# Altium PCB Main.PcbDoc
Units mm, origin at the board's own origin, x right, y up, seen from the top; angles counter-clockwise.
Board outline 15.1 x 29.72 mm, 2 copper layers (Top Layer, Bottom Layer); 24 components, 16 nets, 68 pads, 17 vias.
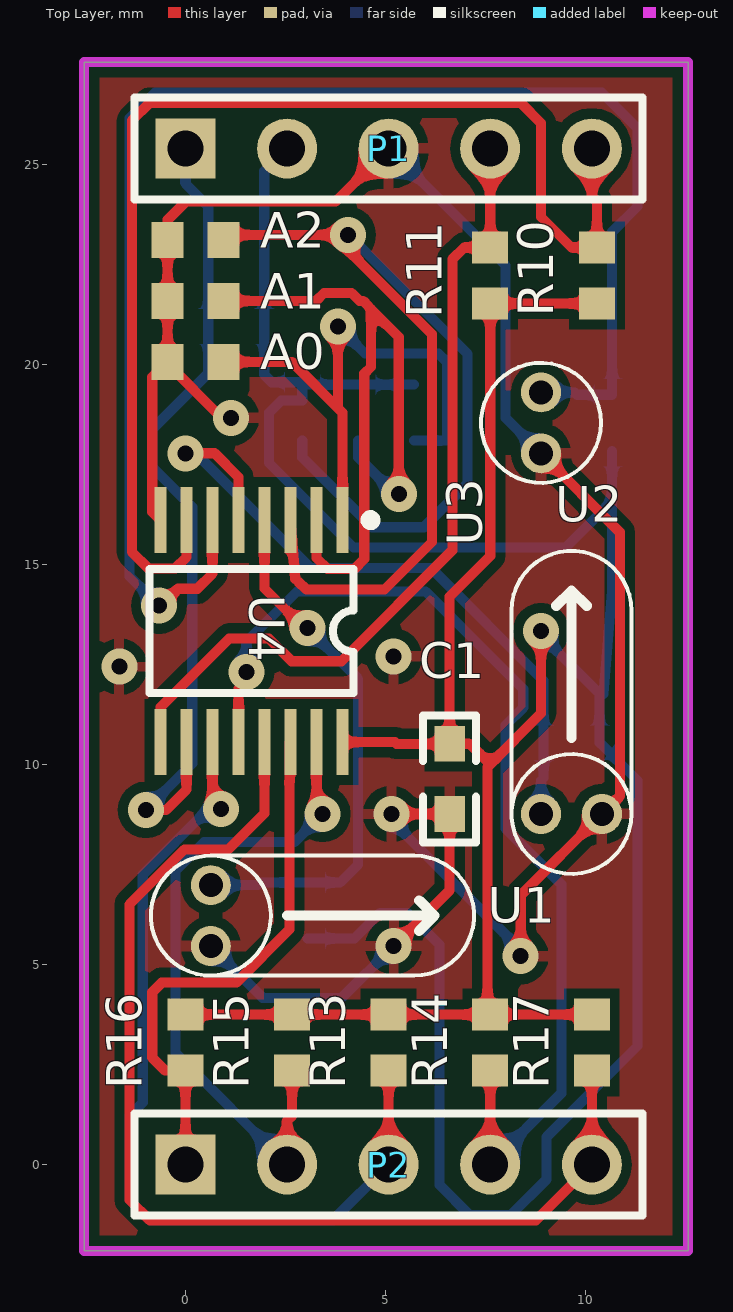
[diagram p0: Top Layer view]
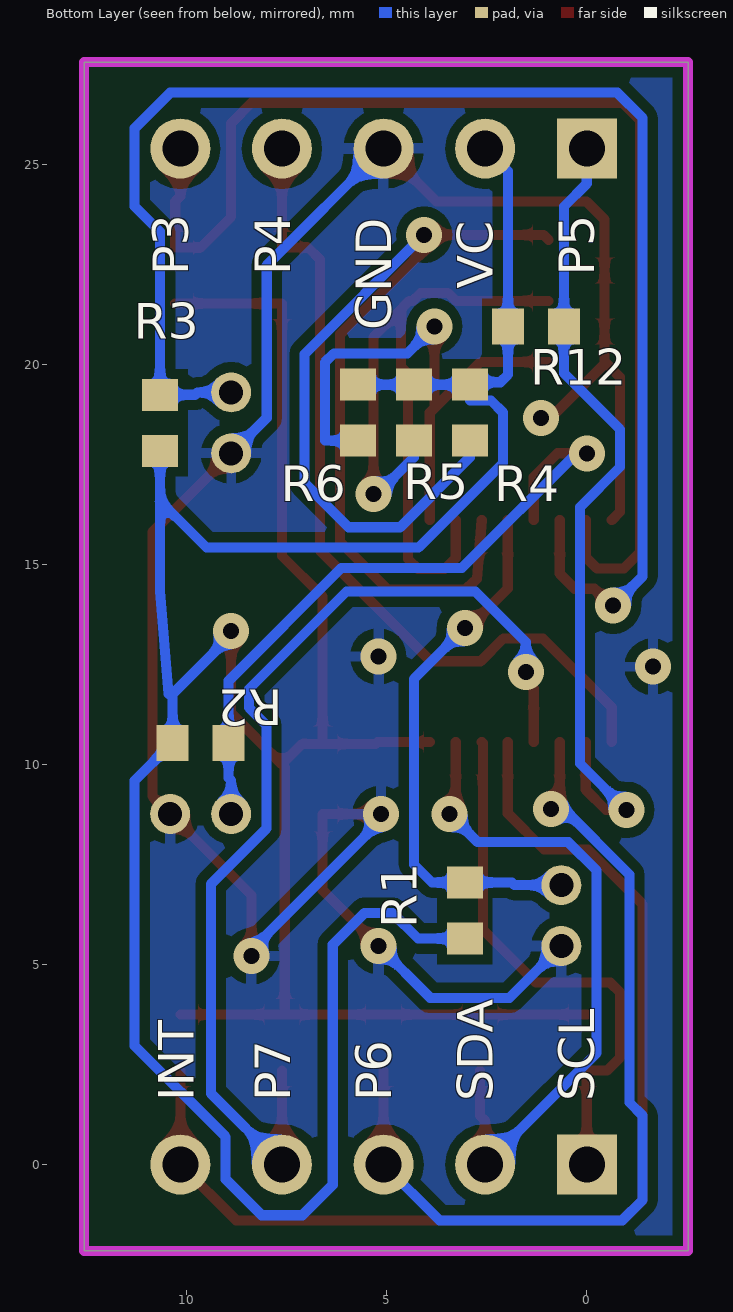
[diagram p1: Bottom Layer view, seen from below]

## Layer stack, top to bottom
Top Solder: solder mask 0.0102, Solder Resist, Dk 3.5
Top Layer: signal copper 0.0356
Dielectric 1: dielectric 0.32, FR-4, Dk 4.8
Bottom Layer: signal copper 0.0356
Bottom Solder: solder mask 0.0102, Solder Resist, Dk 3.5

## Board outline
-2.532,-2.159 -2.532,27.559 12.565,27.559 12.565,-2.159

## Design rules (kind name [scope] priority, off if disabled: settings)
Clearance [All] p1: gap=0.254 ignorepadtopadclearanceinfootprint=FALSE except(0: Arc-Hole Track-Hole SMDPad-Hole THPad-Hole Via-Hole Fill-Hole Poly-Hole Region-Hole Text-Hole)
MinimumSolderMaskSliver MinimumSolderMaskSliver_1 [HasFootprint('TSSOP16')] p1: minsoldermaskwidth=0.14
MinimumSolderMaskSliver [All] p2: minsoldermaskwidth=0.254
PolygonConnect [All] p1: connectstyle=Relief reliefconductorwidth=0.254 reliefentries=4 polygonreliefangle="90 Angle" airgapwidth=0.254
RoutingVias [All] p1: holewidth=0.4 width=0.9 viastyle="Through Hole" minholewidth=0.4 minwidth=0.9 maxholewidth=0.4 maxwidth=0.9
SilkToSolderMaskClearance SilkToSolderMaskClearance_1 [HasFootprint('0603C')] p1: minsilkscreentomaskgap=0.05 clearancetoexposedcopper=TRUE
SilkToSolderMaskClearance SilkToSolderMaskClearance_4 [HasFootprint('0603R')] p2: minsilkscreentomaskgap=0.05 clearancetoexposedcopper=TRUE
SilkToSolderMaskClearance SilkToSolderMaskClearance_3 [HasFootprint('HG-H')] p3: minsilkscreentomaskgap=0.01 clearancetoexposedcopper=TRUE
SilkToSolderMaskClearance SilkToSolderMaskClearance_2 [HasFootprint('HG-V')] p4: minsilkscreentomaskgap=0.01 clearancetoexposedcopper=TRUE
SilkToSolderMaskClearance [IsPad] p5: minsilkscreentomaskgap=0.254 clearancetoexposedcopper=TRUE
SolderMaskExpansion [All] p1: expansion=0.102 istentingtop=FALSE
Width [All] p1: maxlimit=0.254 minlimit=0.254 preferedwidth=0.254
28 further rules are at their usual default settings.

## Components (designator, comment, footprint, x,y, rotation, side; value= is the part's Value field where it differs from the comment)
A0 "Res1" 0603R 0.254,20.066 r0 top value=0R (schematic designator R9)
A1 "Res1" 0603R 0.254,21.59 r0 top value=0R (schematic designator R8)
A2 "Res1" 0603R 0.254,23.114 r0 top value=0R (schematic designator R7)
C1 "106" 0603C 6.604,9.652 r90 top
P1 "Header 5" HDR1X5 0,25.4 r0 top
P2 "Header 5" HDR1X5 0,0 r0 top
R1 "Res1" 0603R 3.048,6.35 r270 bottom value=330K
R2 "Res1" 0603R 9.652,10.541 r0 bottom value=330K
R3 "Res1" 0603R 10.668,18.542 r270 bottom value=330K
R4 "Res1" 0603R 2.921,18.796 r90 bottom value=330K
R5 "Res1" 0603R 4.318,18.796 r90 bottom value=330K
R6 "Res1" 0603R 5.715,18.796 r90 bottom value=330K
R10 "Res1" 0603R 10.287,22.225 r270 top value=330K
R11 "Res1" 0603R 7.62,22.225 r270 top value=330K
R12 "Res1" 0603R 1.27,20.955 r0 bottom value=330K
R13 "Res1" 0603R 5.08,3.048 r90 top value=330K
R14 "Res1" 0603R 7.62,3.048 r90 top value=330K
R15 "Res1" 0603R 2.667,3.048 r90 top value=4.7K
R16 "Res1" 0603R 0,3.048 r90 top value=4.7K
R17 "Res1" 0603R 10.16,3.048 r90 top value=4.7K
U1 "HGswitch" HG-H 0.635,6.223 r0 top
U2 "HGswitch" HG-H 9.652,8.763 r90 top
U3 "HGswitch" HG-V 8.89,18.542 r0 top
U4 "PCA9534" TSSOP16 1.651,13.335 r180 top

## Footprints (in the part's own frame and the unit in brackets; to place one, negate y for a bottom-side part, rotate by r counter-clockwise, add the part's x,y. Pads: shape width x height; smd on the part's side, far side on the other; paste and mask are expansions set on the pad)
0603C [mil] "无极性贴片电容"
  rect 35x30 smd: 1(-35,0) 2(34,0)
  silkscreen extent -63,-26 62,26, body extent -31,-16 31,16, height 32
0603R [mm] "Chip Capacitor, Body 1.6x0.8mm, IPC High Density"
  rect 0.8x0.9 smd: 1(-0.7,0) 2(0.7,0)
  body extent -0.87,-0.48 0.87,0.48, height 1.3
HDR1X5 [mm] "Connector; Header; 5 Position"
  rect 1.5x1.5 hole 0.9: 1(0,0)
  round 1.5 hole 0.9: 2(2.54,0) 3(5.08,0) 4(7.62,0) 5(10.16,0)
  silkscreen extent -1.27,-1.27 11.43,1.27
HG-H [mm]
  round 1 hole 0.6: 1(0,0.762) 2(0,-0.762)
  silkscreen extent -1.5,-1.5 6.58,1.5
HG-V [mm]
  round 1 hole 0.6: 1(0,0.762) 2(0,-0.762)
  silkscreen extent -1.5,-1.5 1.5,1.5
TSSOP16 [mm] "Shrink Small Outline; 16 Leads; Body Width 4.4 mm; Pitch 0.65 mm"
  rect 0.3x1.65 smd: 1(-2.275,-2.775) 2(-1.625,-2.775) 3(-0.975,-2.775) 4(-0.325,-2.775) 5(0.325,-2.775) 6(0.975,-2.775) 7(1.625,-2.775) 8(2.275,-2.775) 9(2.275,2.775) 10(1.625,2.775) 11(0.975,2.775) 12(0.325,2.775) 13(-0.325,2.775) 14(-0.975,2.775) 15(-1.625,2.775) 16(-2.275,2.775)
  silkscreen extent -3.1,-2.9 2.55,1.55

## Part data
A0 A1 A2 R1 R2 R3 R4 R5 R6 R10 R11 R12 R13 R14 R15 R16 R17: "Resistor", LatestRevisionDate=17-Jul-2002, LatestRevisionNote="Re-released for DXP Platform.", PackageDescription="Axial Device, Thru-Hole; 2 Leads; 0.3 in Pin Spacing", PackageReference=AXIAL-0.3, Published=8-Jun-2000, Publisher="Altium Limited"
C1: library part Cap, "Capacitor", LatestRevisionDate=17-Jul-2002, LatestRevisionNote="Re-released for DXP Platform.", PackageDescription="Radial Cap, Thru-Hole; 2 Leads; 0.3 in Pin Spacing", PackageReference=RAD-0.3, Published=8-Jun-2000, Publisher="Altium Limited"
P1 P2: "Header, 5-Pin", LatestRevisionDate=17-Jul-2002, LatestRevisionNote="Re-released for DXP Platform.", Publisher="Altium Limited"

## Via types
v1: diameter 0.9, hole 0.4, Top Layer to Bottom Layer, 17 vias

## Nets (pads, with @x,y where several pads share a name; then routed paths per layer and width w, separated by ;. In a path a pad name is that pad's centre, name@x,y a point inside that pad or via, vN(x,y) a via of type N, cw(c..) or ccw(c..) an arc to the next point about the centre after c; other vN are vias at no path point)
GND: A0.1 A1.1 A2.1 C1.1 P1.3 U1.2 U2.2 U3.2 U4.8 | length 55.7
  Top Layer w0.254: U4.8 -0.831,16.317 -0.831,19.681 A0.1 ; v1(1.143,18.669) 0.901,18.669 -0.446,20.016 A0.1 ; P1.3 3.752,24.072 0.004,24.072 -0.446,23.622 A2.1 A1.1 A0.1 ; v1(5.149,8.763) C1.1 6.604,6.858 v1(5.207,5.461) ; v1(8.382,5.207) 8.382,6.731 U2.2 10.86,9.209 10.86,15.81 U3.2
  Bottom Layer w0.254: U1.2 1.93,4.166 3.912,4.166 v1(5.207,5.461) ; P1.3 8.001,22.479 8.001,18.669 U3.2 ; v1(5.149,8.763) 5.149,8.602 8.382,5.369 v1(8.382,5.207)
  other v1: -1.651,12.446 5.207,12.7
HGX: R1.1 U1.1 U4.4 | length 13.5
  Top Layer w0.254: U4.4 1.976,14.399 2.964,13.411 v1(3.048,13.411)
  Bottom Layer w0.254: U1.1 1.803,6.985 1.868,7.05 R1.1 3.868,7.05 4.318,7.5 4.318,12.141 v1(3.048,13.411)
HGY: R2.1 U2.1 U4.5 | length 17.3
  Top Layer w0.254: v1(0,17.78) 0.73,17.78 1.326,17.184 U4.5
  Bottom Layer w0.254: v1(0,17.78) 0.254,17.78 3.117,14.917 6.133,14.917 8.952,12.098 R2.1 8.952,9.663 8.89,9.601 U2.1
HGZ: R3.1 U3.1 U4.6 | length 37.6
  Top Layer w0.254: v1(-0.66,13.97) -0.615,13.97 -0.189,14.396 0.299,14.396 0.676,14.773 U4.6
  Bottom Layer w0.254: v1(-0.66,13.97) -1.397,14.707 -1.397,26.162 -0.762,26.797 10.414,26.797 11.303,25.908 11.303,23.952 10.668,23.317 R3.1 9.79,19.242 9.728,19.304 U3.1
INT: P2.5 R17.1 U4.13 | length 28.2
  Top Layer w0.254: U4.13 1.976,8.783 1.067,7.874 -0.025,7.874 -1.397,6.502 -1.397,-0.889 -0.889,-1.397 8.763,-1.397 P2.5 R17.1
NetR4_1: A2.2 R4.1 U4.3 | length 30.4
  Top Layer w0.254: A2.2 1.081,23.241 v1(4.064,23.241) 4.064,22.86 6.165,20.759 6.165,15.563 4.978,14.376 3.031,14.376 2.816,14.575 2.747,14.644 U4.3
  Bottom Layer w0.254: R4.1 2.921,17.678 4.666,15.933 5.958,15.933 7.054,17.029 7.054,20.264 4.077,23.241 v1(4.064,23.241)
NetR5_1: A1.2 R5.1 U4.2 | length 19.4
  Top Layer w0.254: A1.2 3.27,21.59 3.466,21.786 4.154,21.786 4.35,21.59 4.441,21.59 4.59,21.441 4.59,21.43 ; U4.2 3.276,15.164 3.556,14.884 4.216,14.884 4.47,15.138 4.47,19.768 4.641,19.939 4.641,21.38 4.59,21.43 ; v1(5.334,16.764) 5.334,20.687 4.59,21.43
  Bottom Layer w0.254: R5.1 4.318,17.678 5.232,16.764 v1(5.334,16.764)
NetR6_1: A0.2 R6.1 U4.1 | length 14.3
  Top Layer w0.254: A0.2 2.656,20.066 3.926,18.796 ; v1(3.81,20.955) 3.81,18.912 3.926,18.796 ; U4.1 3.926,18.796
  Bottom Layer w0.254: v1(3.81,20.955) 4.488,20.277 6.323,20.277 6.546,20.054 6.546,18.096 R6.1
P3: P1.5 R10.1 U4.7 | length 30.6
  Top Layer w0.254: U4.7 0.026,15.184 -0.254,14.904 -0.932,14.904 -1.339,15.311 -1.339,26.1 -0.896,26.543 8.382,26.543 8.89,26.035 8.89,23.687 9.652,22.925 R10.1 10.287,24.079 10.16,24.206 P1.5
P4: P1.4 R11.1 U4.9 | length 21.1
  Top Layer w0.254: U4.9 -0.624,11.43 1.096,13.15 2.084,13.15 2.654,12.58 3.901,12.58 6.673,15.353 6.673,22.631 6.967,22.925 R11.1 P1.4
P5: P1.1 R12.1 U4.10 | length 20.7
  Top Layer w0.254: v1(-0.99,8.865) -0.482,8.865 0.026,9.373 U4.10
  Bottom Layer w0.254: v1(-0.99,8.865) 0.171,10.025 0.171,16.434 -0.831,17.436 -0.831,18.378 0.57,19.779 R12.1 0.57,23.114 0.57,23.952 0,24.522 P1.1
P6: P2.3 R13.1 U4.11 | length 22.3
  Top Layer w0.254: U4.11 0.676,9.255 0.889,9.042 v1(0.889,8.89) ; P2.3 R13.1
  Bottom Layer w0.254: v1(0.889,8.89) 0.576,8.89 -1.067,7.248 -1.067,1.549 -1.397,1.219 -1.397,-0.889 -0.889,-1.397 3.683,-1.397 P2.3
P7: P2.4 R14.1 U4.12 | length 26.8
  Top Layer w0.254: U4.12 1.326,11.892 1.524,12.09 v1(1.524,12.319) ; P2.4 R14.1
  Bottom Layer w0.254: v1(1.524,12.319) 1.524,13.062 2.787,14.326 6.006,14.326 8.444,11.887 8.444,11.422 8.009,10.987 8.009,8.398 9.398,7.009 9.398,1.778 P2.4
SCL: P2.1 R16.1 U4.14 | length 13.7
  Top Layer w0.254: P2.1 R16.1 -0.508,2.348 -0.831,2.671 -0.831,4.306 -0.59,4.547 1.27,4.547 2.598,5.875 2.598,10.532 U4.14
SDA: P2.2 R15.1 U4.15 | length 17
  Top Layer w0.254: P2.2 2.54,1.092 2.667,1.219 R15.1 ; U4.15 3.276,8.916 v1(3.429,8.763)
  Bottom Layer w0.254: P2.2 -0.246,2.786 -0.246,7.35 0.463,8.059 2.725,8.059 v1(3.429,8.763)
VCC: C1.2 P1.2 R1.2 R2.2 R3.2 R4.2 R5.2 R6.2 R10.2 R11.2 R12.2 R13.2 R14.2 R15.2 R16.2 R17.2 U4.16 | length 95.6
  Top Layer w0.254: R16.2 R15.2 R13.2 R14.2 ; U4.16 5.232,10.56 5.277,10.516 C1.2 ; v1(8.89,13.335) 8.89,11.278 7.62,10.008 ; R17.2 R14.2 ; R10.2 R11.2 7.62,15.215 6.604,14.199 C1.2 ; C1.2 7.112,10.516 7.62,10.008 ; R14.2 7.551,3.817 7.551,9.939 7.62,10.008
  Bottom Layer w0.254: P1.2 1.97,24.83 R12.2 1.97,19.747 2.159,19.558 2.859,19.558 R4.2 ; R1.2 4.221,5.65 4.863,6.292 5.551,6.292 6.35,5.493 6.35,-0.508 7.112,-1.27 8.128,-1.27 9.029,-0.369 9.029,0.691 11.303,2.965 11.303,9.601 10.363,10.541 R2.2 10.352,11.771 8.89,13.233 v1(8.89,13.335) ; R6.2 R5.2 R4.2 ; 10.454,11.763 10.668,14.337 10.668,16.586 ; R3.2 10.668,16.586 ; R4.2 2.921,19.101 2.395,19.101 2.09,18.796 2.09,17.538 4.203,15.425 9.507,15.425 10.668,16.586

## Polygon pours and split planes (outlines as drawn)
GND on Top Layer "GND_L01_P004" (solid, remove dead copper, pour order 4): -2.532,-2.159 -2.532,27.559 12.565,27.559 12.565,-2.159
GND on Bottom Layer "GND_L02_P005" (solid, remove dead copper, pour order 5): -2.532,-2.159 -2.532,27.559 12.565,27.559 12.565,-2.159

## Keep-outs
Keep-Out Layer:
  the board outline again, w0.254

## Silkscreen, mask and mechanical layers (free items; w line width, h text height)
Bottom Overlay:
  text "P5" at -0.492,22.225 h1.52 r270
  text "P4" at 7.112,22.235 h1.52 r270
  text "P3" at 9.668,22.232 h1.52 r270
  text "VC" at 2.048,21.898 h1.52 r270
  text "GND" at 4.588,20.851 h1.52 r270
  text "SCL" at -0.492,1.577 h1.52 r270
  text "SDA" at 2.048,1.577 h1.52 r270
  text "P6" at 4.588,1.577 h1.52 r270
  text "P7" at 7.112,1.577 h1.52 r270
  text "INT" at 9.525,1.577 h1.52 r270
Top Solder:
  text "SM" at 9.471,5.407 h1